# Altium PCB PCB1.PcbDoc
Units mil, origin at the board's own origin, x right, y up, seen from the top; angles counter-clockwise.
Board outline 6000 x 4000 mil, 2 copper layers (Top Layer, Bottom Layer); 21 components, 0 nets, 97 pads, 0 vias.
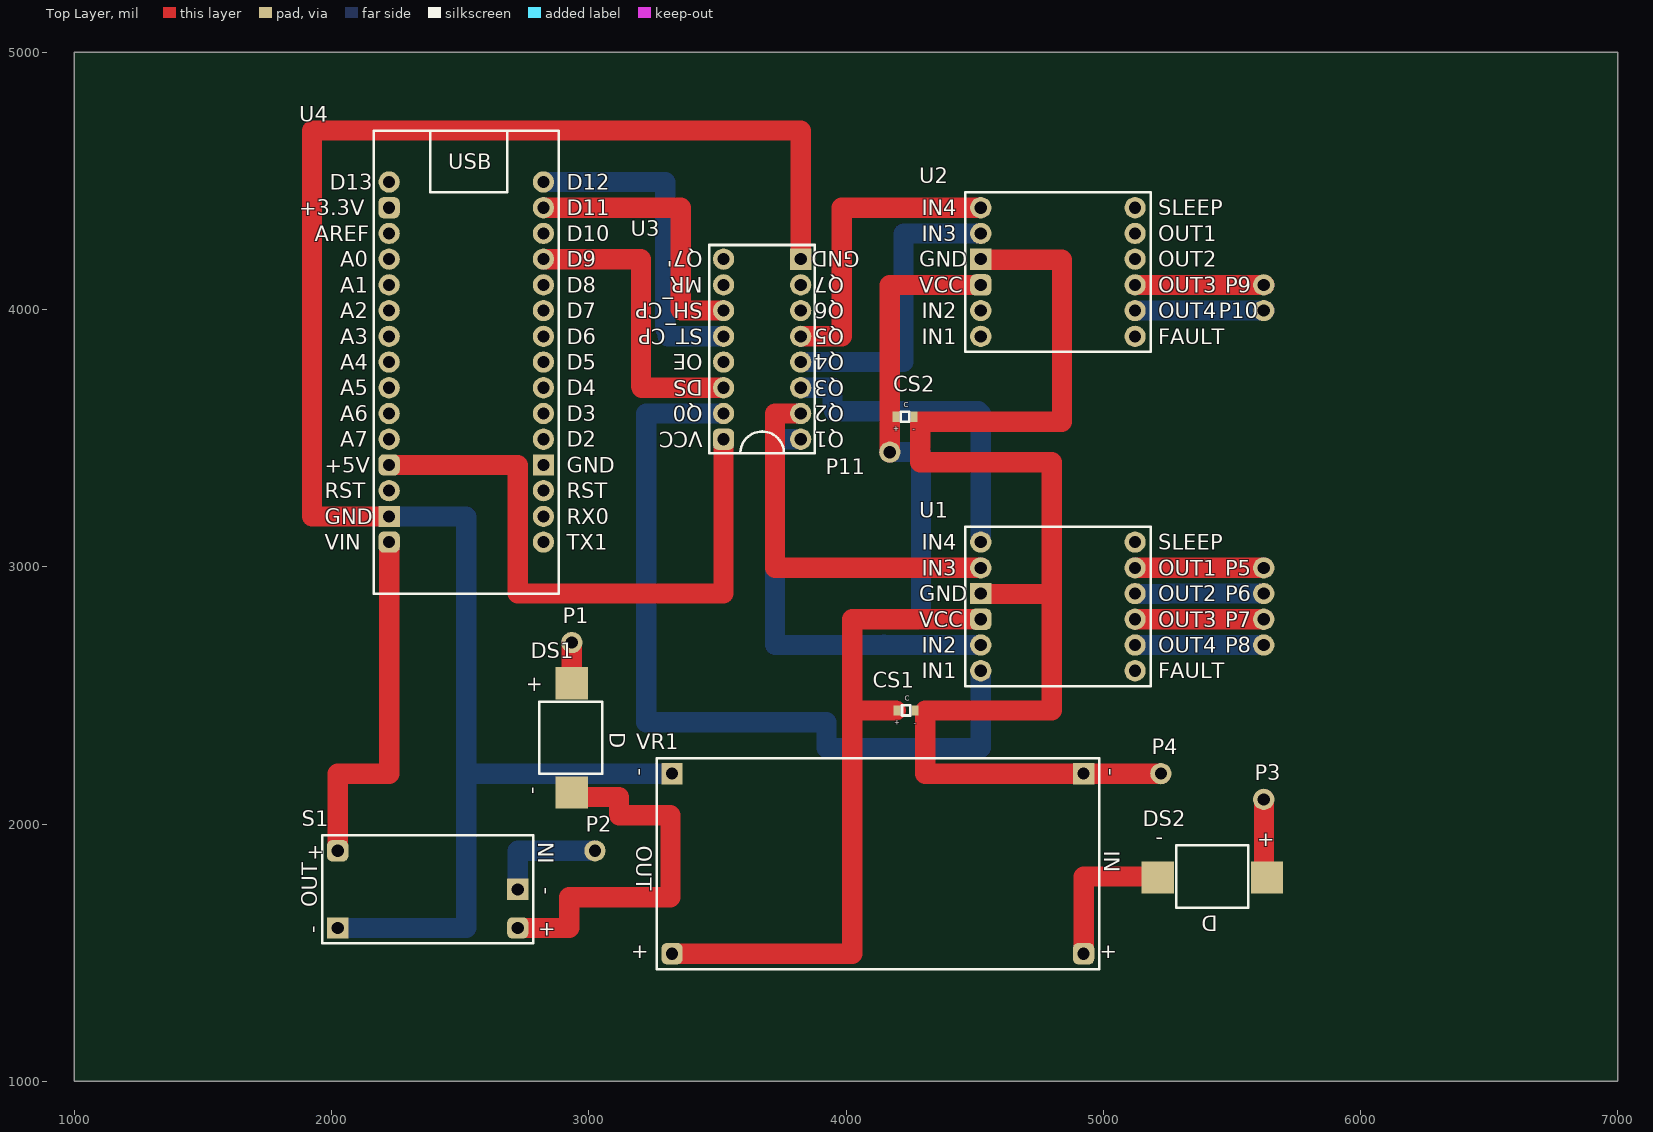
[diagram p0: Top Layer view]
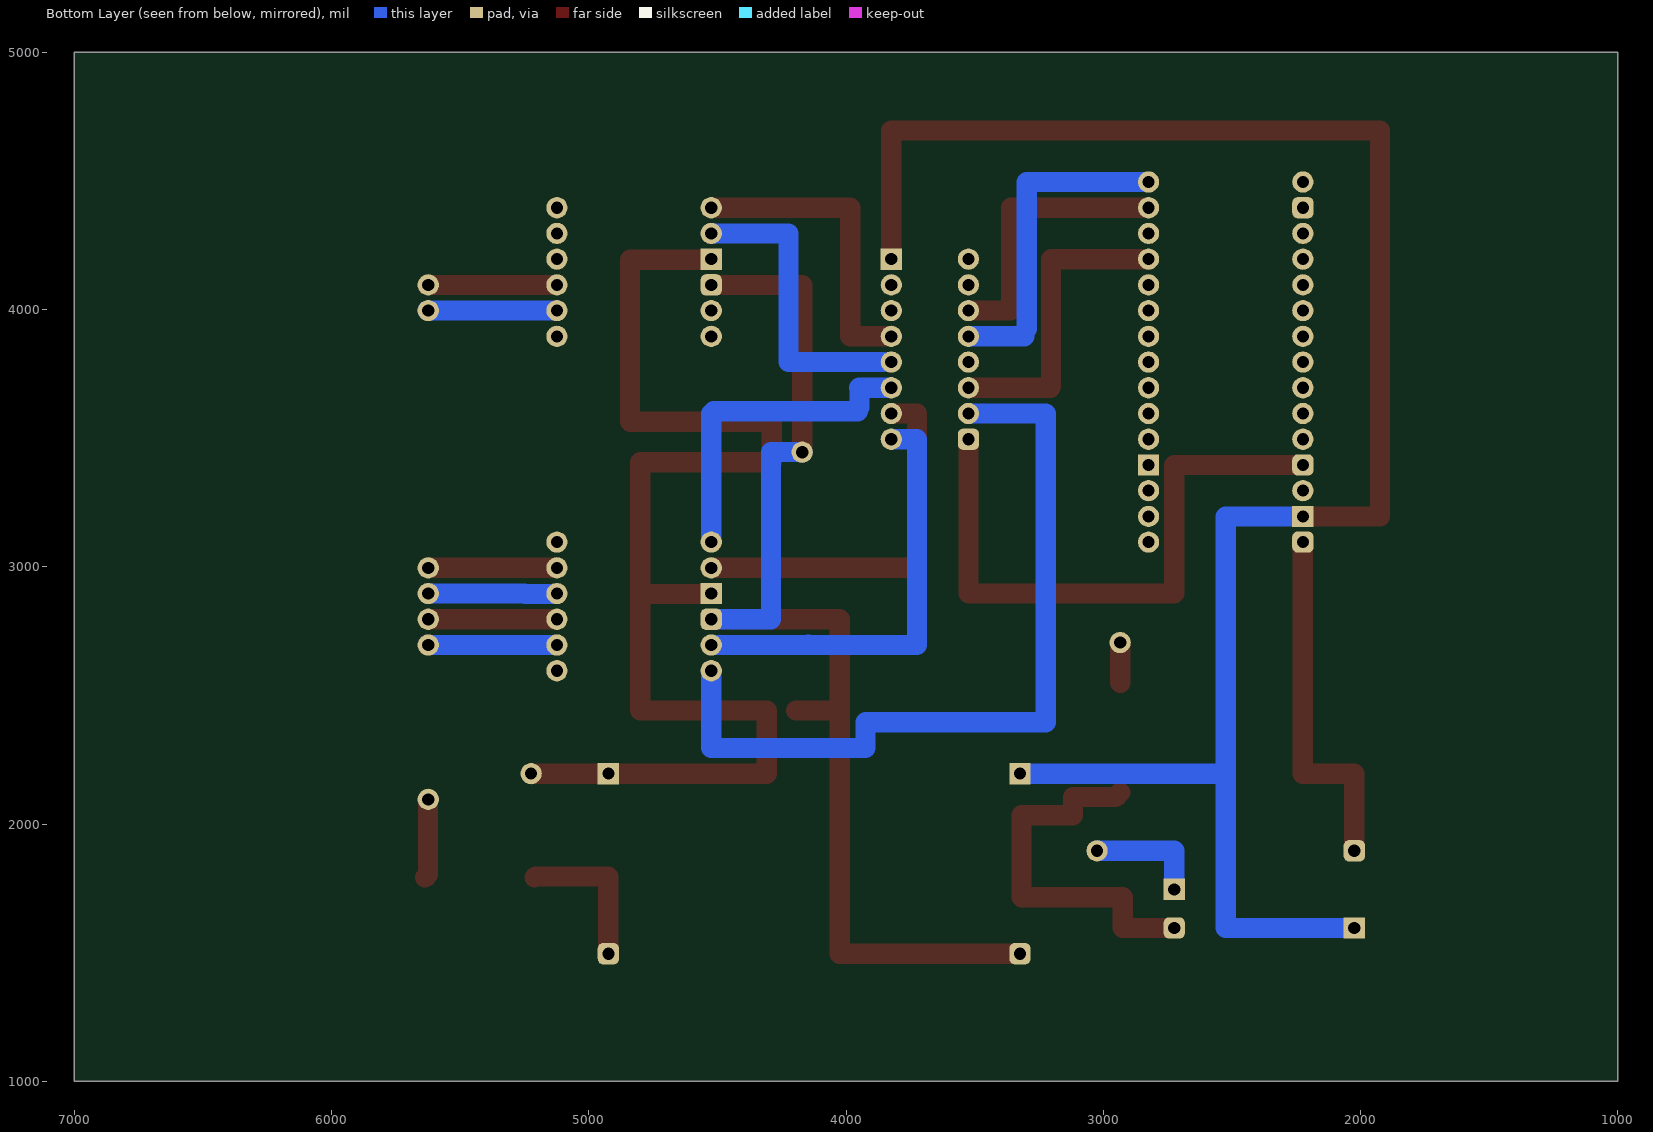
[diagram p1: Bottom Layer view, seen from below]

## Layer stack, top to bottom
Top Solder: solder mask 0.4, Solder Resist, Dk 3.5
Top Layer: signal copper 1.4
Dielectric 1: dielectric 12.6, FR-4, Dk 4.8
Bottom Layer: signal copper 1.4
Bottom Solder: solder mask 0.4, Solder Resist, Dk 3.5

## Board outline
1000,1000 7000,1000 7000,5000 1000,5000

## Design rules (kind name [scope] priority, off if disabled: settings)
AssemblyTestPointUsage [All] p1: isadvanced=TRUE
AssemblyTestpoint [All] p1: isadvanced=TRUE testpointundercomponent=TRUE minsize=40 maxsize=100 preferedsize=60 minholesize=0 maxholesize=40 preferedholesize=32 testpointgrid=1 usegrid=TRUE gridtolerance=0.01 allowsidetop=TRUE allowsidebottom=TRUE
Clearance Clearance_1 [OnMid vs OnMid] p1: gap=78.74 ignorepadtopadclearanceinfootprint=FALSE sourcerule=36 cellrowname=All cellrowtype=0 cellcolname=All cellcoltype=0 innerlayers=TRUE
Clearance Clearance_2 [(ExistsOnLayer('Top Layer') Or ExistsOnLayer('Bottom Layer')) vs (ExistsOnLayer('Top Layer') Or ExistsOnLayer('Bottom Layer'))] p2: gap=78.74 ignorepadtopadclearanceinfootprint=FALSE sourcerule=36 cellrowname=All cellrowtype=0 cellcolname=All cellcoltype=0 outerlayers=TRUE
Clearance [All] p3: gap=10 ignorepadtopadclearanceinfootprint=FALSE ismatrix=TRUE
ComponentClearance [All] p1: isadvanced=TRUE gap=10 collisioncheckmode=3 verticalgap=10 showdistances=FALSE
FabricationTestPointUsage [All] p1: isadvanced=TRUE valid=0 allowmultiple=FALSE
FabricationTestpoint [All] p1: isadvanced=TRUE side=3 testpointundercomponent=TRUE minsize=40 maxsize=100 preferedsize=60 minholesize=0 maxholesize=40 preferedholesize=32 testpointgrid=1 allowsidetop=TRUE allowsidebottom=TRUE usegrid=TRUE gridtolerance=0.01
FanoutControl Fanout_BGA [IsBGA] p1: isadvanced=TRUE bgadir=Out bgaviamode=Centered fanoutstyle=Auto fanoutdirection=Alternating viagrid=1 // Fanout_BGA (Default Rule)
FanoutControl Fanout_LCC [IsLCC] p2: isadvanced=TRUE bgadir=Out bgaviamode=Centered fanoutstyle=Auto fanoutdirection=Alternating viagrid=1 // Fanout_LCC (Default Rule)
FanoutControl Fanout_SOIC [IsSOIC] p3: isadvanced=TRUE bgadir=Out bgaviamode=Centered fanoutstyle=Auto fanoutdirection=Alternating viagrid=1 // Fanout_SOIC (Default Rule)
FanoutControl Fanout_Small [(CompPinCount < 5)] p4: isadvanced=TRUE bgadir=Out bgaviamode=Centered fanoutstyle=Auto fanoutdirection=OutThenIn viagrid=1 // Fanout_Small (Default Rule)
FanoutControl Fanout_Default [All] p5: isadvanced=TRUE bgadir=Out bgaviamode=Centered fanoutstyle=Auto fanoutdirection=Alternating viagrid=1 // Fanout_Default (Default Rule)
Height [All] p1: isadvanced=TRUE minheight=0 maxheight=1000 prefheight=500
HoleSize [All] p1: isadvanced=TRUE absolutevalues=TRUE maxlimit=100 minlimit=1 maxpercent=80.000 minpercent=20.000
HoleToHoleClearance [All] p1: isadvanced=TRUE gap=10 allowstackedmicrovias=TRUE
LayerPairs [All] p1: isadvanced=TRUE enforce=TRUE
MinimumSolderMaskSliver [All] p1: isadvanced=TRUE minsoldermaskwidth=10
NetAntennae [All] p1: isadvanced=TRUE netantennaetolerance=0
PasteMaskExpansion [All] p1: isadvanced=TRUE expansion=0
PlaneClearance [All] p1: isadvanced=TRUE clearance=20
PlaneConnect [All] p1: isadvanced=TRUE planeconnectstyle=Relief reliefexpansion=20 reliefentries=4 reliefconductorwidth=10 reliefairgap=10
PolygonConnect [All] p1: connectstyle=Relief reliefconductorwidth=10 reliefentries=4 polygonreliefangle="90 Angle" airgapwidth=10
RoutingCorners [All] p1: isadvanced=TRUE cornerstyle=45-Degree minsetback=100 maxsetback=100
RoutingPriority [All] p1: isadvanced=TRUE routingpriority=0
RoutingVias [All] p1: holewidth=28 width=50 viastyle="Through Hole" minholewidth=28 minwidth=50 maxholewidth=28 maxwidth=50
ShortCircuit [All] p1: isadvanced=TRUE allowed=FALSE
SilkToSilkClearance [All] p1: isadvanced=TRUE silktosilkclearance=10
SilkToSolderMaskClearance [IsPad] p1: isadvanced=TRUE minsilkscreentomaskgap=10 clearancetoexposedcopper=TRUE
SolderMaskExpansion [All] p1: isadvanced=TRUE expansion=4 istentingtop=FALSE
UnRoutedNet [All] p1: isadvanced=TRUE
UnpouredPolygon [All] p1: isadvanced=TRUE
Width [All] p1: maxlimit=78.74 minlimit=78.74 preferedwidth=78.74 minimp=50.000000 maximp=50.000000 favimp=50.000000
4 further rules are at their usual default settings.

## Components (designator, comment, footprint, x,y, rotation, side; value= is the part's Value field where it differs from the comment)
CS1 "CapacitorSMD" CapacitorSMD 4233.35,2441.5 r0 top
CS2 "CapacitorSMD" CapacitorSMD 4229.41,3583.23 r0 top
DS1 "DiodeSS32SMD" DiodeSS32SMD 2930.2,2335.2 r270 top
DS2 "DiodeSS32SMD" DiodeSS32SMD 5423.9,1795.83 r180 top
P1 "Pin" P 2934.13,2705.28 r0 top
P2 "Pin" P 3023.9,1895.83 r0 top
P3 "Pin" P 5623.9,2095.83 r0 top
P4 "Pin" P 5223.9,2195.83 r0 top
P5 "Pin" P 5623.9,2995.83 r0 top
P6 "Pin" P 5623.9,2895.83 r0 top
P7 "Pin" P 5623.9,2795.83 r0 top
P8 "Pin" P 5623.9,2695.83 r0 top
P9 "Pin" P 5623.9,4095.83 r0 top
P10 "Pin" P 5623.9,3995.83 r0 top
P11 "Pin" P 4170.35,3445.43 r0 top
S1 "SX1308" "DC-DC Step-Up Footprint" 1923.9,1495.83 r0 top
U1 "DRV8833" PCB_DRV8833 4423.9,2495.83 r0 top
U2 "DRV8833" PCB_DRV8833 4423.9,3795.83 r0 top
U3 "74HC595" PCB_74HC595_Footprint 3923.9,4295.83 r180 top
U4 "DRV8833" PCB_ATMega328p 2123.9,2995.83 r0 top
VR1 "LM2596" "DC-DC Step-Down Footprint" 5023.9,2295.83 r180 top

## Footprints (in the part's own frame and the unit in brackets; to place one, negate y for a bottom-side part, rotate by r counter-clockwise, add the part's x,y. Pads: shape width x height; smd on the part's side, far side on the other; paste and mask are expansions set on the pad)
CapacitorSMD [mm]
  rect 0.7x1 smd: 0(-0.9,0) 1(0.9,0)
  silkscreen extent -0.4,-0.5 0.4,0.5
"DC-DC Step-Down Footprint" [mm]
  rrect50% 2.1x2.1 hole 1.2: 0(2.54,20.32) 2(43.18,20.32)
  rect 2.1x2.1 hole 1.2: 1(2.54,2.54) 3(43.18,2.54)
  silkscreen extent 1.02,1.02 44.7,21.84
"DC-DC Step-Up Footprint" [mm]
  rrect50% 2.1x2.1 hole 1.2: 0(2.54,10.16) 3(20.32,2.54)
  rect 2.1x2.1 hole 1.2: 1(2.54,2.54) 2(20.32,6.35)
  silkscreen extent 1.02,1.02 21.84,11.68
DiodeSS32SMD [mm]
  rect 3.2x3.2 smd: 0(-5.4,0.1) 1(5.4,0.1)
  silkscreen extent -3.55,-3.1 3.55,3.1
P [mm]
  round 2.1 hole 1.2: 0(0,0)
PCB_74HC595_Footprint [mm]
  rect 2.1x2.1 hole 1.2: 0(2.54,2.54)
  round 2.1 hole 1.2: 1(2.54,5.08) 2(2.54,7.62) 3(2.54,10.16) 4(2.54,12.7) 5(2.54,15.24) 6(2.54,17.78) 7(2.54,20.32) 9(10.16,17.78) 10(10.16,15.24) 11(10.16,12.7) 12(10.16,10.16) 13(10.16,7.62) 14(10.16,5.08) 15(10.16,2.54)
  rrect50% 2.1x2.1 hole 1.2: 8(10.16,20.32)
  silkscreen extent 1.14,1.14 11.56,21.72
PCB_ATMega328p [mm]
  rrect50% 2.1x2.1 hole 1.2: 0(2.54,2.54) 3(2.54,10.16) 13(2.54,35.56)
  rect 2.1x2.1 hole 1.2: 1(2.54,5.08) 26(17.78,10.16)
  round 2.1 hole 1.2: 2(2.54,7.62) 4(2.54,12.7) 5(2.54,15.24) 6(2.54,17.78) 7(2.54,20.32) 8(2.54,22.86) 9(2.54,25.4) 10(2.54,27.94) 11(2.54,30.48) 12(2.54,33.02) 14(2.54,38.1) 15(17.78,38.1) 16(17.78,35.56) 17(17.78,33.02) 18(17.78,30.48) 19(17.78,27.94) 20(17.78,25.4) 21(17.78,22.86) 22(17.78,20.32) 23(17.78,17.78) 24(17.78,15.24) 25(17.78,12.7) 27(17.78,7.62) 28(17.78,5.08) 29(17.78,2.54)
  silkscreen extent 1.02,-2.54 19.3,43.18
PCB_DRV8833 [mm]
  round 2.1 hole 1.2: 0(2.54,2.54) 1(2.54,5.08) 4(2.54,12.7) 5(2.54,15.24) 6(17.78,15.24) 7(17.78,12.7) 8(17.78,10.16) 9(17.78,7.62) 10(17.78,5.08) 11(17.78,2.54)
  rrect50% 2.1x2.1 hole 1.2: 2(2.54,7.62)
  rect 2.1x2.1 hole 1.2: 3(2.54,10.16)
  silkscreen extent 1.02,1.02 19.3,16.76

## Part data
S1: "Модуль mini DC-DC Step-Up Converter 2.5...10V to 5V / 8V / 9V / 12V - это миниатюрный повышающий преобразователь постоянного тока на микросхеме импульсного преобразователя SX1308.  /  /  Выходное напряжение на преобразователе имеет четыре фиксированных настройки - 5В, 8В, 9В или 12В, одно из этих напряжений выбирается запайкой соответствующей комбинации перемычек A и B (по табличке на обратной стороне платы). /  /  Максимальный выходной ток зависит от установленного выходного напряжения, при 5В он равен 1А, при 8В - 0.5А, 9В - 0,45А, 12В - 0.3А. Частота преобразования - 1.2 МГц. /  /  На плате (со стороны Vout) светодиод - индикатор питания. По умолчанию он выключен. Для включения этого светодиода также нужно запаять соседнюю перемычку."
U1 U2: library part "Motor Driver", "Драйвер крокового/колекторних двигунів DRV8833"
U3: library part SCS-16, "SN74HC595N - вихідний зсувний регістр 74HC595"
U4: library part "Arduino Nano", "DCCduino Nano CH340 - аналог Arduino Nano v3.0 TYPE C"
VR1: library part "DC-DC Step-Down", "DC-DC конвертер знижуючий 4.5...40В на 1.5...35В на LM2596"

## Nets (pads, with @x,y where several pads share a name; then routed paths per layer and width w, separated by ;. In a path a pad name is that pad's centre, name@x,y a point inside that pad or via, vN(x,y) a via of type N, cw(c..) or ccw(c..) an arc to the next point about the centre after c; other vN are vias at no path point)
pads on no net: CS1.0 CS1.1 CS2.0 CS2.1 DS1.0 DS1.1 DS2.0 DS2.1 P1.0 P2.0 P3.0 P4.0 P5.0 P6.0 P7.0 P8.0 P9.0 P10.0 P11.0 S1.0 S1.1 S1.2 S1.3 U1.0 U1.1 U1.2 U1.3 U1.4 U1.5 U1.6 U1.7 U1.8 U1.9 U1.10 U1.11 U2.0 U2.1 U2.2 U2.3 U2.4 U2.5 U2.6 U2.7 U2.8 U2.9 U2.10 U2.11 U3.0 U3.1 U3.2 U3.3 U3.4 U3.5 U3.6 U3.7 U3.8 U3.9 U3.10 U3.11 U3.12 U3.13 U3.14 U3.15 U4.0 U4.1 U4.2 U4.3 U4.4 U4.5 U4.6 U4.7 U4.8 U4.9 U4.10 U4.11 U4.12 U4.13 U4.14 U4.15 U4.16 U4.17 U4.18 U4.19 U4.20 U4.21 U4.22 U4.23 U4.24 U4.25 U4.26 U4.27 U4.28 U4.29 VR1.0 VR1.1 VR1.2 VR1.3
copper on no net: | length 40477.7
  Top Layer w78.74: 2023.9,1895.83 2023.9,2195.83 2223.9,2195.83 2223.9,3095.83 ; 2201.85,3195.83 1923.9,3195.83 1923.9,4695.83 3823.9,4695.83 3823.9,4195.83 ; 2223.9,3395.83 2723.9,3395.83 2723.9,2895.83 3523.9,2895.83 3523.9,3495.83 ; 2723.9,1595.83 2923.9,1595.83 2923.9,1715.51 3317.6,1715.51 3317.6,2034.02 3117.2,2034.02 3117.2,2104.88 2951.85,2104.88 2934.13,2122.6 ; 2823.9,4195.83 3203.43,4195.83 3203.43,3701.34 ; 2823.9,4395.83 3357.76,4395.83 3357.76,4264.21 ; 2934.13,2547.8 2934.13,2705.28 ; 3205.79,3695.83 3523.9,3695.83 ; 3323.9,1495.83 4023.9,1495.83 4023.9,2441.5 ; 3357.36,4000.55 3357.36,4261.06 ; 3359.33,3995.83 3523.9,3995.83 ; 3823.9,3595.83 3723.9,3595.83 3723.9,2995.83 4523.9,2995.83 ; 3825.87,3895.83 3823.9,3895.83 3973.5,3895.83 ; 3983.35,3895.83 3983.35,4286.09 ; 3983.35,4288.06 3983.35,4395.83 ; 3993.19,4395.83 4523.9,4395.83 ; 4170.35,3445.43 4170.35,4095.04 4523.11,4095.04 4523.9,4095.83 ; 4193.98,2441.5 4023.9,2441.5 ; 4308.15,2195.83 4766.81,2195.83 ; 4308.15,2205.28 4308.15,2441.5 4465.63,2441.5 ; 4470.75,2441.5 4598.31,2441.5 4792.4,2441.5 ; 4523.9,2795.83 4023.9,2795.83 4023.9,2441.5 ; 4525.87,2894.25 4800.28,2894.25 ; 4525.87,4193.46 4839.65,4193.46 4839.65,3563.54 4780.59,3563.54 4465.63,3563.54 4288.46,3563.54 4288.46,3406.06 4800.28,3406.06 4800.28,2894.25 ; 4760.91,2195.83 4923.9,2195.83 5223.9,2195.83 ; 4800.28,2441.5 4800.28,2894.25 ; 4923.9,1495.83 4923.9,1795.83 5207.36,1795.83 5211.3,1791.89 ; 5123.9,2795.83 5623.9,2795.83 ; 5123.9,2995.83 5623.9,2995.83 ; 5123.9,4095.83 5627.05,4095.83 ; 5623.9,2095.83 5624.65,2095.07 5624.65,1803.73 5636.5,1791.89
  Bottom Layer w78.74: 2023.9,1595.83 2523.9,1595.83 2523.9,2205.28 ; 2223.9,3195.83 2523.9,3195.83 2523.9,2205.28 ; 2723.9,1745.83 2723.9,1895.83 3023.9,1895.83 ; 2823.9,4495.83 3297.13,4495.83 3297.13,3924.96 ; 3307.36,3895.83 3523.9,3895.83 ; 3323.9,2195.83 2533.35,2195.83 2523.9,2205.28 ; 3523.9,3595.83 3223.9,3595.83 3223.9,2395.83 3923.9,2395.83 3923.9,2295.83 4523.9,2295.83 4523.9,2595.83 ; 3823.9,3495.83 3723.9,3495.83 3723.9,2695.83 4524.69,2695.83 ; 3823.9,3695.83 3947.95,3695.83 ; 3855.39,3795.83 4223.9,3795.83 4223.9,4295.83 4523.9,4295.83 ; 3947.95,3619.88 3947.95,3695.83 ; 3949.39,3695.83 3948.67,3696.55 3947.95,3695.83 ; 3953.03,3604.88 4514.84,3604.88 4523.9,3595.83 4523.9,3095.83 ; 4145.16,2695.83 4146.73,2697.4 ; 4170.35,3445.43 4171.11,3446.19 4291.19,3446.19 4291.19,2797.04 4292.4,2795.83 4523.9,2795.83 ; 5123.9,2695.83 5623.9,2695.83 ; 5123.9,2895.83 5125.47,2894.25 5247.82,2894.25 5249.39,2895.83 5498.4,2895.83 5623.9,2895.83 ; 5123.9,3995.83 5627.05,3995.83

## Text inside footprints (layer, text, board x,y; h text height)
CS1: Top Overlay "C" at 4227.6,2479.06 h19.68; Top Overlay "-" at 4263.03,2382.6 h19.68; Top Overlay "+" at 4188.23,2385.22 h19.68
CS2: Top Overlay "+" at 4184.29,3526.96 h19.68; Top Overlay "-" at 4259.09,3524.33 h19.68; Top Overlay "C" at 4223.66,3620.79 h19.68
DS1: Top Overlay "-" at 2760.6,2144.09 h60 r270; Top Overlay "+" at 2764.85,2577.16 h60 r270; Top Overlay "D" at 3081.93,2356.69 h60 r270
DS2: Top Overlay "D" at 5445.39,1644.09 h60 r180; Top Overlay "+" at 5665.87,1961.18 h60 r180; Top Overlay "-" at 5232.8,1965.42 h60 r180
S1: Top Overlay "+" at 2803.9,1565.83 h60; Top Overlay "-" at 2853.89,1725.83 h60 r90; Top Overlay "IN" at 2863.9,1845.83 h60 r90; Top Overlay "-" at 1953.89,1575.83 h60 r90; Top Overlay "+" at 1903.9,1865.83 h60; Top Overlay "OUT" at 1943.9,1675.83 h60 r90
U1: Top Overlay "IN1" at 4293.9,2565.83 h60; Top Overlay "IN2" at 4293.9,2665.83 h60; Top Overlay "VCC" at 4283.9,2765.83 h60; Top Overlay "GND" at 4283.9,2865.83 h60; Top Overlay "IN3" at 4293.9,2965.83 h60; Top Overlay "IN4" at 4293.9,3065.83 h60; Top Overlay "SLEEP" at 5213.9,3065.83 h60; Top Overlay "OUT1" at 5213.9,2965.83 h60; Top Overlay "OUT2" at 5213.9,2865.83 h60; Top Overlay "OUT3" at 5213.9,2765.83 h60; Top Overlay "OUT4" at 5213.9,2665.83 h60; Top Overlay "FAULT" at 5213.9,2565.83 h60
U2: Top Overlay "FAULT" at 5213.9,3865.83 h60; Top Overlay "OUT4" at 5213.9,3965.83 h60; Top Overlay "OUT3" at 5213.9,4065.83 h60; Top Overlay "OUT2" at 5213.9,4165.83 h60; Top Overlay "OUT1" at 5213.9,4265.83 h60; Top Overlay "SLEEP" at 5213.9,4365.83 h60; Top Overlay "IN4" at 4293.9,4365.83 h60; Top Overlay "IN3" at 4293.9,4265.83 h60; Top Overlay "GND" at 4283.9,4165.83 h60; Top Overlay "VCC" at 4283.9,4065.83 h60; Top Overlay "IN2" at 4293.9,3965.83 h60; Top Overlay "IN1" at 4293.9,3865.83 h60
U3: Top Overlay "Q7'" at 3443.9,4225.83 h60 r180; Top Overlay "MR" at 3443.9,4125.83 h60 r180; Top Overlay "SH_CP" at 3443.9,4025.83 h60 r180; Top Overlay "ST_CP" at 3443.9,3925.83 h60 r180; Top Overlay "OE" at 3443.9,3825.83 h60 r180; Top Overlay "DS" at 3443.9,3725.83 h60 r180; Top Overlay "Q0" at 3443.9,3625.83 h60 r180; Top Overlay "VCC" at 3443.9,3525.83 h60 r180; Top Overlay "GND" at 4053.9,4225.83 h60 r180; Top Overlay "Q7" at 3993.9,4125.83 h60 r180; Top Overlay "Q6" at 3993.9,4025.83 h60 r180; Top Overlay "Q5" at 3993.9,3925.83 h60 r180; Top Overlay "Q4" at 3993.9,3825.83 h60 r180; Top Overlay "Q3" at 3993.9,3725.83 h60 r180; Top Overlay "Q2" at 3993.9,3625.83 h60 r180; Top Overlay "Q1" at 3993.9,3525.83 h60 r180
U4: Top Overlay "USB" at 2453.9,4545.83 h60; Top Overlay "TX1" at 2913.9,3065.83 h60; Top Overlay "RX0" at 2913.9,3165.83 h60; Top Overlay "RST" at 2913.9,3265.83 h60; Top Overlay "GND" at 2913.9,3365.83 h60; Top Overlay "D2" at 2913.9,3465.83 h60; Top Overlay "D3" at 2913.9,3565.83 h60; Top Overlay "D4" at 2913.9,3665.83 h60; Top Overlay "D5" at 2913.9,3765.83 h60; Top Overlay "D6" at 2913.9,3865.83 h60; Top Overlay "D7" at 2913.9,3965.83 h60; Top Overlay "D8" at 2913.9,4065.83 h60; Top Overlay "D9" at 2913.9,4165.83 h60; Top Overlay "D10" at 2913.9,4265.83 h60; Top Overlay "D11" at 2913.9,4365.83 h60; Top Overlay "D12" at 2913.9,4465.83 h60; Top Overlay "VIN" at 1973.9,3065.83 h60; Top Overlay "GND" at 1973.9,3165.83 h60; Top Overlay "RST" at 1973.9,3265.83 h60; Top Overlay "+5V" at 1973.9,3365.83 h60; Top Overlay "A7" at 2033.9,3465.83 h60; Top Overlay "A6" at 2033.9,3565.83 h60; Top Overlay "A5" at 2033.9,3665.83 h60; Top Overlay "A4" at 2033.9,3765.83 h60; Top Overlay "A3" at 2033.9,3865.83 h60; Top Overlay "A2" at 2033.9,3965.83 h60; Top Overlay "A1" at 2033.9,4065.83 h60; Top Overlay "A0" at 2033.9,4165.83 h60; Top Overlay "AREF" at 1933.9,4265.83 h60; Top Overlay "+3.3V" at 1873.9,4365.83 h60; Top Overlay "D13" at 1993.9,4465.83 h60
VR1: Top Overlay "OUT" at 3183.9,1915.83 h60 r270; Top Overlay "IN" at 5003.9,1895.83 h60 r270; Top Overlay "+" at 3233.9,1525.82 h60 r180; Top Overlay "-" at 3173.91,2215.83 h60 r270; Top Overlay "-" at 5003.91,2215.83 h60 r270; Top Overlay "+" at 5053.9,1525.82 h60 r180